# EAGLE board canon (EAGLE 5.10)
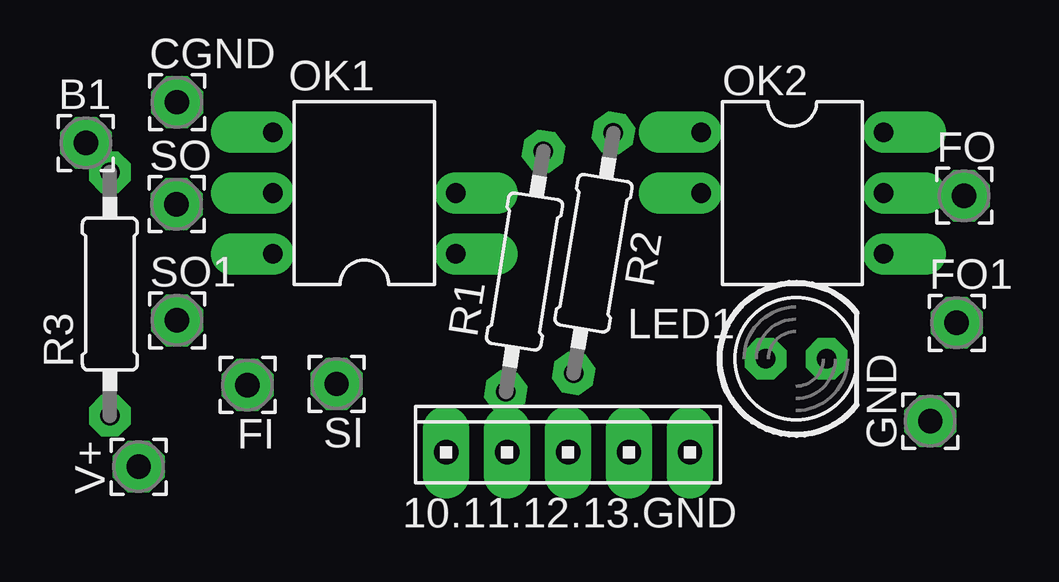
[diagram p0: board, top side]
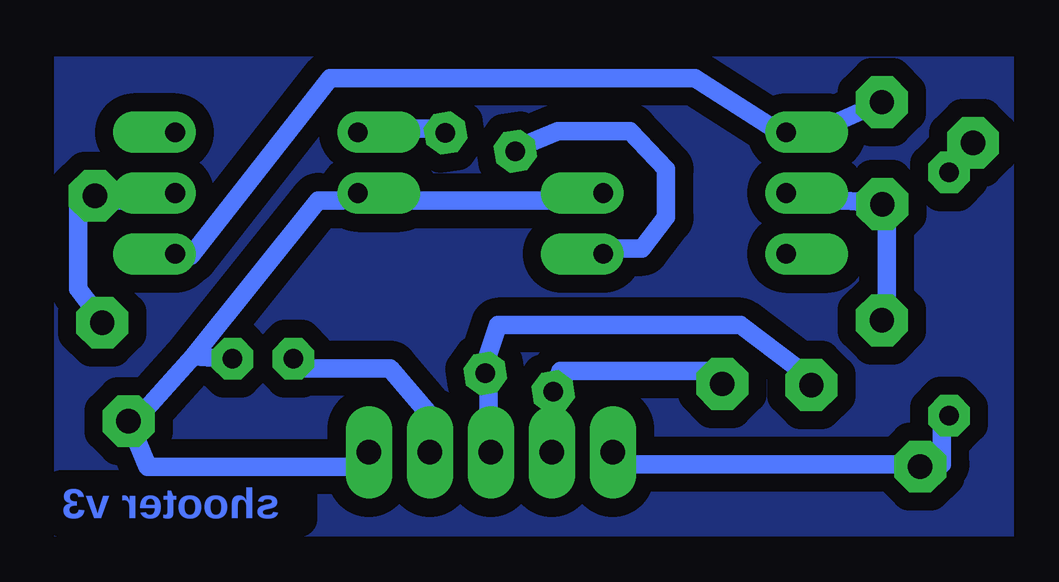
[diagram p1: board, bottom side, seen from below]

No outline drawn. Coordinates in mm, seen from the top.
Copper layers (1*16): Top 0.035mm / dielectric 1.5mm / Bottom 0.035mm
Design rules "default *": minimum track width 30mil, minimum drill 30mil, track to track 30mil, track to pad 25mil, pad to pad 8mil, via to via 8mil, smd to smd 8mil, copper to edge 40mil, drill to drill 8mil, minimum pad ring 18mil, minimum via ring 8mil, stop-mask expansion 4mil, vias tented up to drill 0mil, thermal gap 10mil
Net classes: 1 A1: width 1.981 mm, drill 0.991 mm, clearance 0.635 mm

## Footprints (pad centres in the part's own frame; a part is rotated, then mirrored left to right if it is on the bottom)
10X05MTA = drill 1.016 long: 1 5.08,0; 2 2.54,0; 3 0,0; 4 -2.54,0; 5 -5.08,0
2,15/1,0 = drill 1.016 pad 2.159 octagon: 1 0,0
LED5MM = drill 0.813 pad 1.676 octagon: A -1.27,0; K 1.27,0
DIL06 = drill 0.813 offset: 1 -2.54,-3.81; 2 0,-3.81; 4 2.54,3.81; 5 0,3.81; 6 -2.54,3.81
0207/10 = drill 0.813 pad 1.676 octagon: 1 -5.08,0; 2 5.08,0
0207/10' = drill 0.813 octagon: 1 -5.08,0; 2 5.08,0

## Placement (x,y rotation side)
10.11.12.13.GND  [10X05MTA]  21.8,3.5 0 top
B1  [2,15/1,0]  1.7,16.4 0 top
CGND  [2,15/1,0]  5.5,18.1 0 top
FI  [2,15/1,0]  8.44,6.3 180 top
FO  [2,15/1,0]  38.31,14.2 0 top
FO1  [2,15/1,0]  38,8.9 0 top
GND  [2,15/1,0]  36.9,4.8 90 top
LED1  [LED5MM]  31.3,7.4 0 top
OK1  4N35  [DIL06]  13.31,14.31 90 top
OK2  4N35  [DIL06]  31.15,14.31 270 top
R1  1k  [0207/10]  19.99,11.04 81.1 top
R2  1k  [0207/10]  22.86,11.8 80.6 top
R3  1k  [0207/10']  2.7,10.1 90 top
SI  [2,15/1,0]  12.15,6.35 180 top
SO  [2,15/1,0]  5.48,13.85 0 top
SO1  [2,15/1,0]  5.5,9 0 top
V+  [2,15/1,0]  3.9,2.9 90 top

## Library data of the parts
10.11.12.13.GND = con-amp
B1 CGND FI FO FO1 GND SI SO SO1 V+ = wirepad
LED1 R1 R2 = adafruit
OK1 OK2 = optocouplerxxx
R3 = resistor

## Nets
N$1: OK1.1 R1.2
N$2: OK2.1 R2.2
N$3: 10.11.12.13.GND.5 R3.1 V+.1
N$4: B1.1 R3.2
N$5: FO1.1 FO.1 OK2.5
N$6: 10.11.12.13.GND.1 GND.1 LED1.K OK1.2 OK2.2
N$7: OK1.5 SO1.1 SO.1
N$8: 10.11.12.13.GND.3 FI.1 R2.1
N$9: 10.11.12.13.GND.4 R1.1 SI.1
N$10: CGND.1 OK1.4 OK2.4
N$12: 10.11.12.13.GND.2 LED1.A

## Tracks (layer width: path | path; a pad name or v marks a point on that pad's centre or on a via)
N$1
  Bottom 0.762: OK1.1 17,12 15.5,12 14.5,13.3 14.5,15.3 16,16.9 19,16.9 20.2,16.4 R1.2
N$2
  Bottom 0.762: R2.2 24,17 27,17 OK2.1
N$3
  Bottom 0.762: R3.1 3,5 3,3 V+.1 4,3 16,3 10.11.12.13.GND.5
N$4
  Bottom 0.762: R3.2 2.2,15.6 2,16 B1.1
N$5
  Bottom 0.762: OK2.5 35,14 38,14 FO.1 39,13.7 39,10.3 38,9 FO1.1
N$6
  Bottom 0.762: 10.11.12.13.GND.1 27.5,2.9 36.1,2.9 GND.1 36.7,4.7 34.2,7.5 | 34.2,7.5 32.8,7.4 LED1.K | 34.2,7.5 29,14 28,14 OK2.2 27,14 18,14 OK1.2
N$7
  Bottom 0.762: OK1.5 9,14 7,14 SO.1 6,14 5.3,13 5.3,9 SO1.1
N$8
  Bottom 0.762: 10.11.12.13.GND.3 21.9,4.1 21.9,6.1 R2.1 22,7 22.1,7 21.5,8.8 11.4,8.8 9,7 FI.1
N$9
  Bottom 0.762: 10.11.12.13.GND.4 19.3,4 19.3,6 R1.1 18.9,6.9 12,6.9 SI.1
N$10
  Bottom 0.762: CGND.1 8,17 9,17 OK1.4 10,17 13.3,19.1 28.5,19.1 34.3,11.7 34.9,11.7 OK2.4
N$11
  pour Bottom: 0,0 40,0 40,20 0,20
N$12
  Bottom 0.762: LED1.A 30,7 26,7 24.3,5 24.3,4 10.11.12.13.GND.2

## Text on the board
Bottom: shooter v3